# EAGLE board untitled (EAGLE 9.3.0)
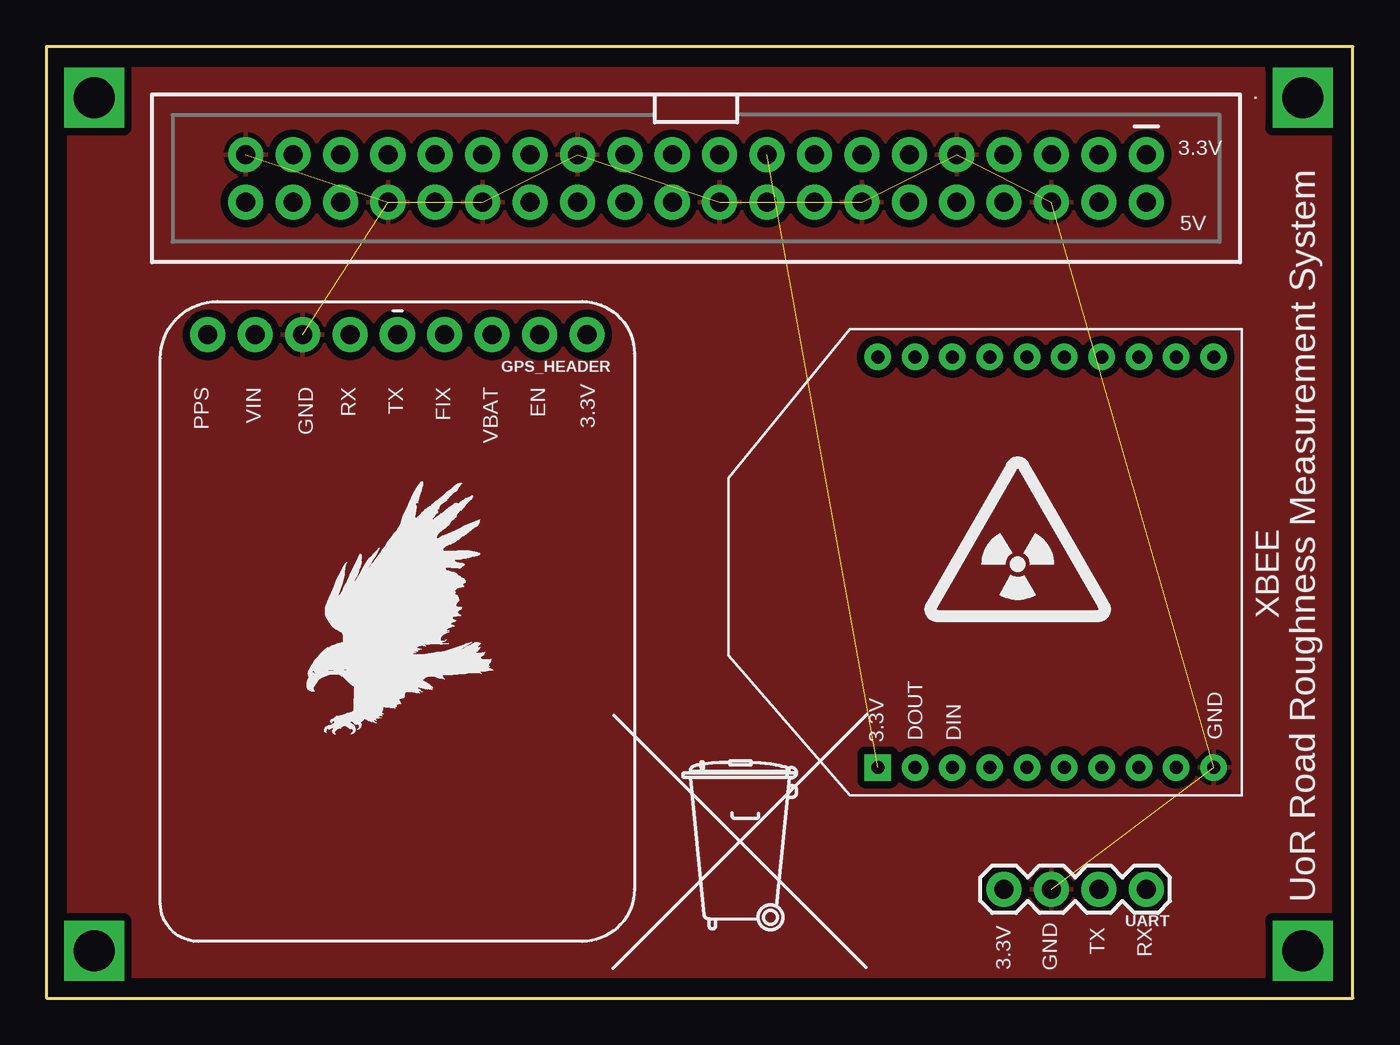
[diagram p0: board, top side]
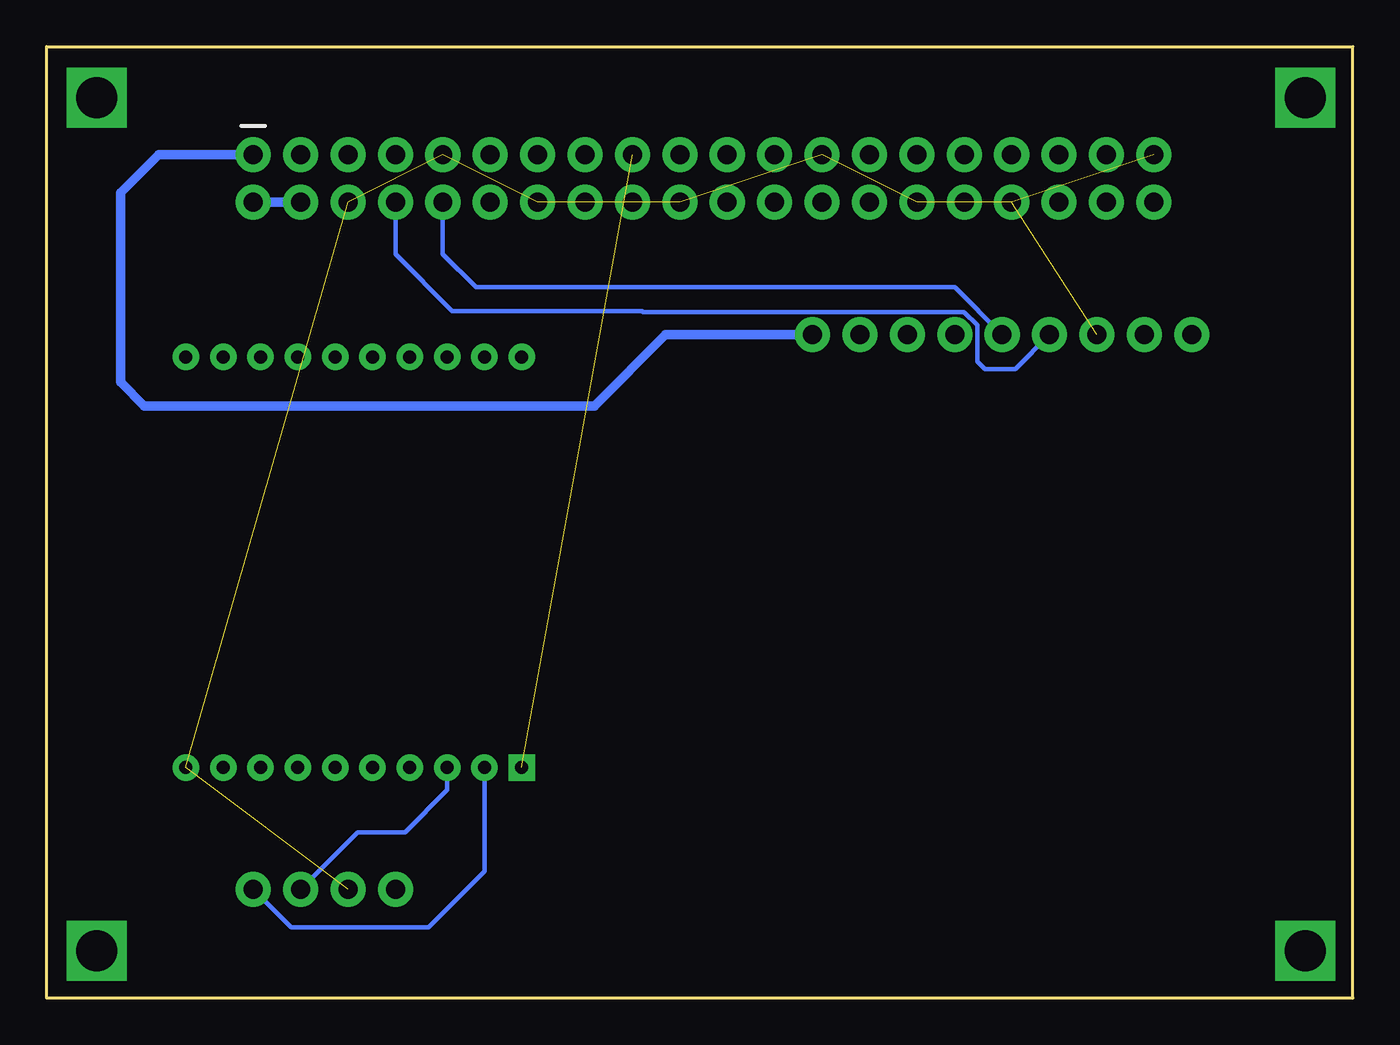
[diagram p1: board, bottom side, seen from below]

Size 70 x 51 mm. Coordinates in mm from the lower left corner, seen from the top.
Outline: 0,0 70,0 70,51 0,51 0,0
Copper layers (1*16): Top 0.035mm / dielectric 1.53mm / Bottom 0.035mm
Design rules "default *": minimum track width 6mil, minimum drill 0.35mm, track to track 6mil, track to pad 6mil, pad to pad 6mil, via to via 6mil, smd to smd 6mil, copper to edge 40mil, drill to drill 6mil, minimum pad ring 10mil, minimum via ring 8mil, stop-mask expansion 4mil, vias tented up to drill 0mil, thermal gap 10mil

## Footprints (pad centres in the part's own frame; a part is rotated, then mirrored left to right if it is on the bottom)
2X20_SHROUDED = drill 1.016 pad 1.88: 1 -1.27,24.13; 2 1.27,24.13; 3 -1.27,21.59; 4 1.27,21.59; 5 -1.27,19.05; 6 1.27,19.05; 7 -1.27,16.51; 8 1.27,16.51; 9 -1.27,13.97; 10 1.27,13.97; 11 -1.27,11.43; 12 1.27,11.43; 13 -1.27,8.89; 14 1.27,8.89; 15 -1.27,6.35; 16 1.27,6.35; 17 -1.27,3.81; 18 1.27,3.81; 19 -1.27,1.27; 20 1.27,1.27; 21 -1.27,-1.27; 22 1.27,-1.27; 23 -1.27,-3.81; 24 1.27,-3.81; 25 -1.27,-6.35; 26 1.27,-6.35; 27 -1.27,-8.89; 28 1.27,-8.89; 29 -1.27,-11.43; 30 1.27,-11.43; 31 -1.27,-13.97; 32 1.27,-13.97; 33 -1.27,-16.51; 34 1.27,-16.51; 35 -1.27,-19.05; 36 1.27,-19.05; 37 -1.27,-21.59; 38 1.27,-21.59; 39 -1.27,-24.13; 40 1.27,-24.13
1X09_NO_SILK = drill 1.016 pad 1.88: 1 0,0; 2 2.54,0; 3 5.08,0; 4 7.62,0; 5 10.16,0; 6 12.7,0; 7 15.24,0; 8 17.78,0; 9 20.32,0
1X04 = drill 1.016 pad 1.88: 1 0,0; 2 2.54,0; 3 5.08,0; 4 7.62,0
XBEE = drill 0.7 pad 1.422 square: 1 -11,5.5 | drill 0.7 pad 1.422: 2 -11,3.5; 3 -11,1.5; 4 -11,-0.5; 5 -11,-2.5; 6 -11,-4.5; 7 -11,-6.5; 8 -11,-8.5; 9 -11,-10.5; 10 -11,-12.5; 11 11,-12.5; 12 11,-10.5; 13 11,-8.5; 14 11,-6.5; 15 11,-4.5; 16 11,-2.5; 17 11,-0.5; 18 11,1.5; 19 11,3.5; 20 11,5.5

## Placement (x,y rotation side)
.  RASPBERRYPI-40-PIN-GPIO_PTH  [2X20_SHROUDED]  34.8,43.94 270 top
GPS_HEADER  [1X09_NO_SILK]  28.96,35.56 180 top
U$3  [EAGLE-PLC-10MM]  13.94,14.12 0 top
U$4  [RADIOACTIVE_10.00]  46.81,20.17 0 top
U$5  [TONNE]  37.01,5.66 0 top
UART  [1X04]  58.93,5.84 180 top
XBEE  XBEE  [XBEE]  50.04,23.37 90 top

## Library data of the parts
. = SparkFun-Connectors; PROD_ID: CONN-12263; SF_ID: PRT-13054
GPS_HEADER = SparkFun-Connectors
U$3-U$5 = logo
UART = SparkFun-Connectors; PROD_ID: CONN-09696
XBEE = adafruit

## Nets
5V: ..2 ..4
GND: ..6 ..9 ..14 ..20 ..25 ..30 ..34 ..39 GPS_HEADER.7 UART.3 XBEE.10
N$1: ..1 GPS_HEADER.1
N$3: ..10 GPS_HEADER.5
N$4: ..8 GPS_HEADER.6
RX: UART.1 XBEE.2
TX: UART.2 XBEE.3
VCC: ..17 XBEE.1

## Tracks (layer width: path | path; a pad name or v marks a point on that pad's centre or on a via)
5V
  Bottom 0.508: ..2 ..4
GND  (10 unrouted)
  pour Top (isolate 0.406): 0,51 70,51 70,0 0,0
N$1
  Bottom 0.508: GPS_HEADER.1 36.83,35.56 40.64,31.75 64.77,31.75 66.04,33.02 66.04,43.18 64.01,45.21 ..1
N$2  (via drill 2.2)
  other vias: 2.54,48.26
N$3
  Bottom 0.254: GPS_HEADER.5 21.34,38.1 46.99,38.1 48.77,39.88 ..10
N$4
  Bottom 0.254: ..8 51.31,39.88 48.26,36.83 38.1,36.83 38.05,36.78 20.83,36.78 20.12,36.06 20.12,34.11 19.72,33.72 18.1,33.72 GPS_HEADER.6
N$5  (via drill 2.2)
  other vias: 67.31,48.26
N$6  (via drill 2.2)
  other vias: 67.31,2.54
N$7  (via drill 2.2)
  other vias: 2.54,2.54
RX
  Bottom 0.254: UART.1 56.9,3.81 49.53,3.81 46.54,6.8 XBEE.2
TX
  Bottom 0.254: UART.2 53.34,8.89 50.8,8.89 48.54,11.15 XBEE.3
VCC  (1 unrouted)

## Text on the board
tPlace: 3.3V | 5V | PPS | VIN | GND | RX | TX | FIX | VBAT | EN | 3.3V | DOUT | 3.3V | DIN | GND | UoR Road Roughness Measurement System | 3.3V | GND | TX | RX